# Altium PCB AC.PcbDoc
Units mm, origin at the board's own origin, x right, y up, seen from the top; angles counter-clockwise.
Board outline 72.39 x 44.07 mm, 2 copper layers (Top Layer, Bottom Layer); 13 components, 13 nets, 43 pads, 0 vias.
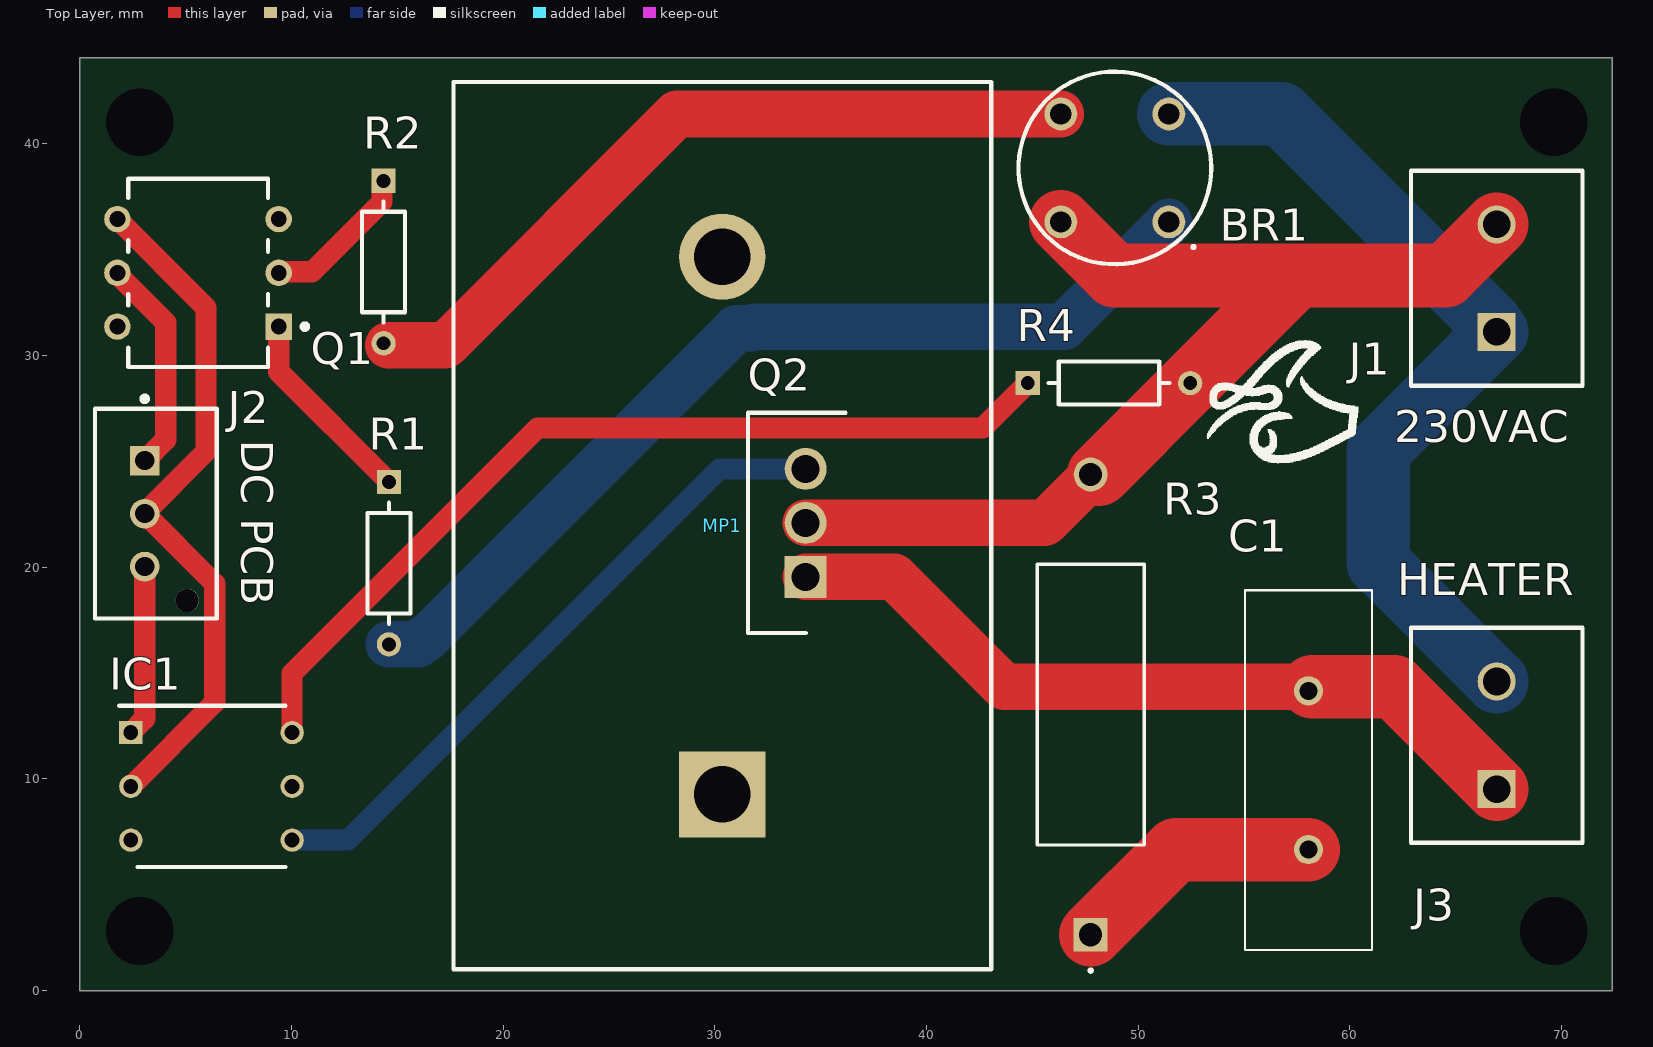
[diagram p0: Top Layer view]
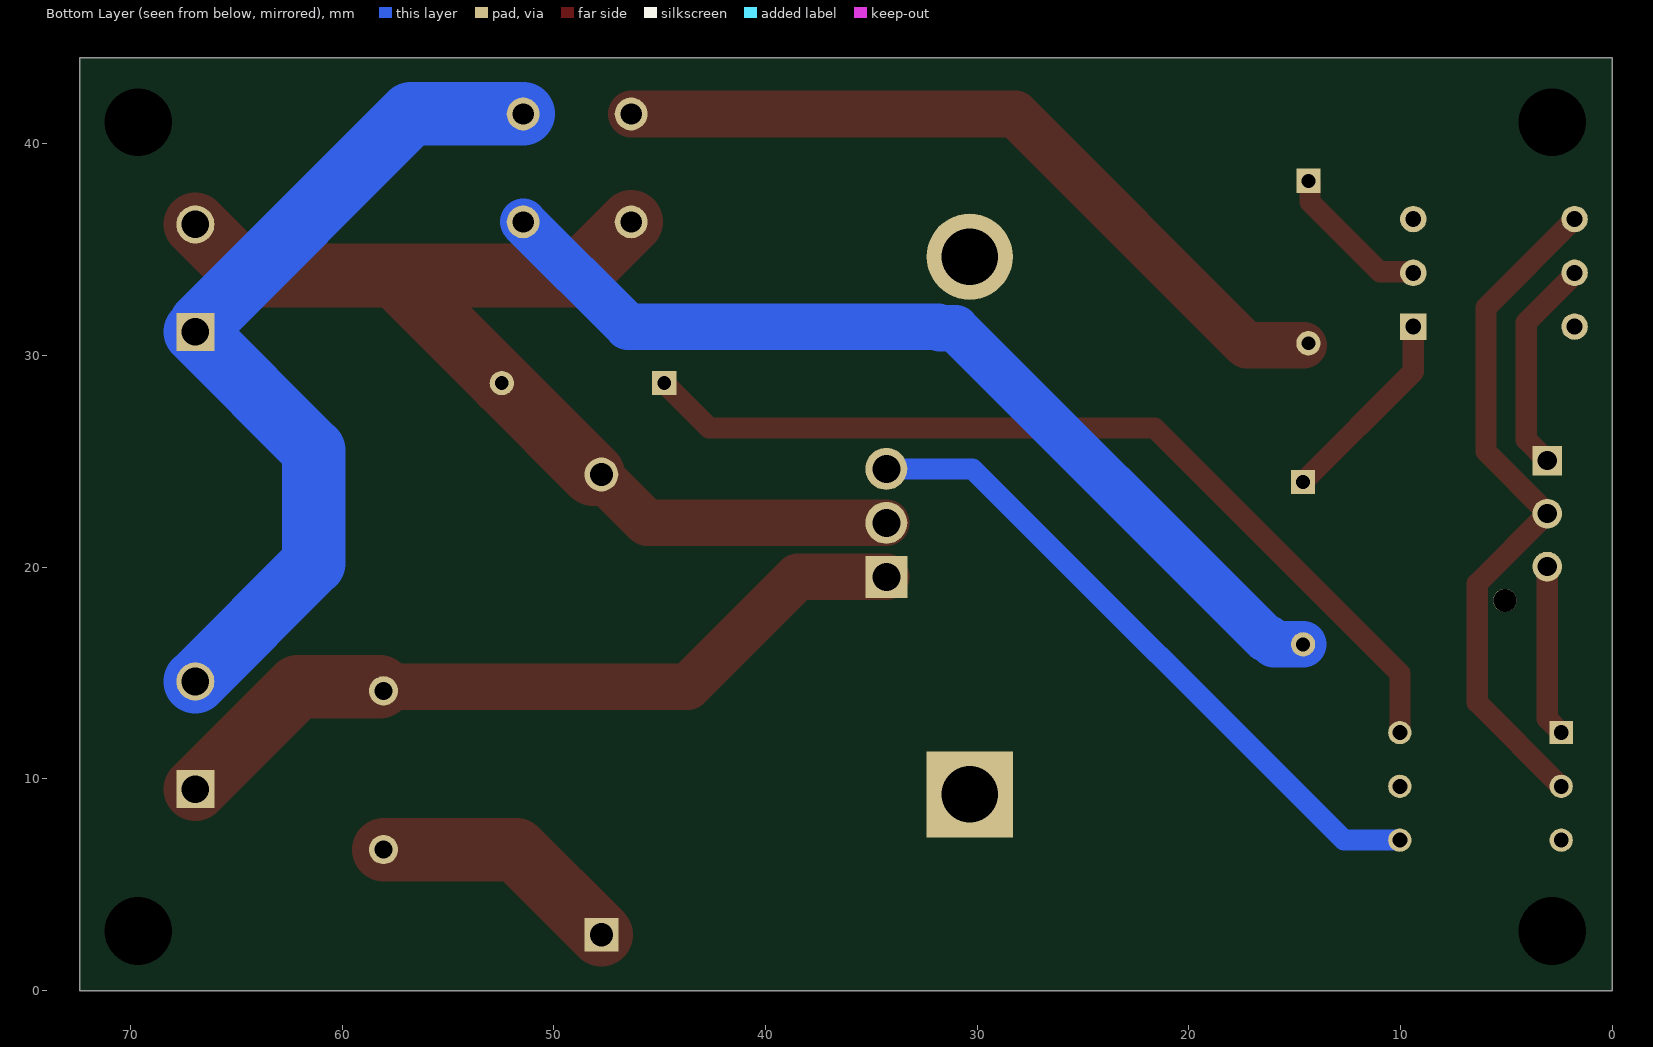
[diagram p1: Bottom Layer view, seen from below]
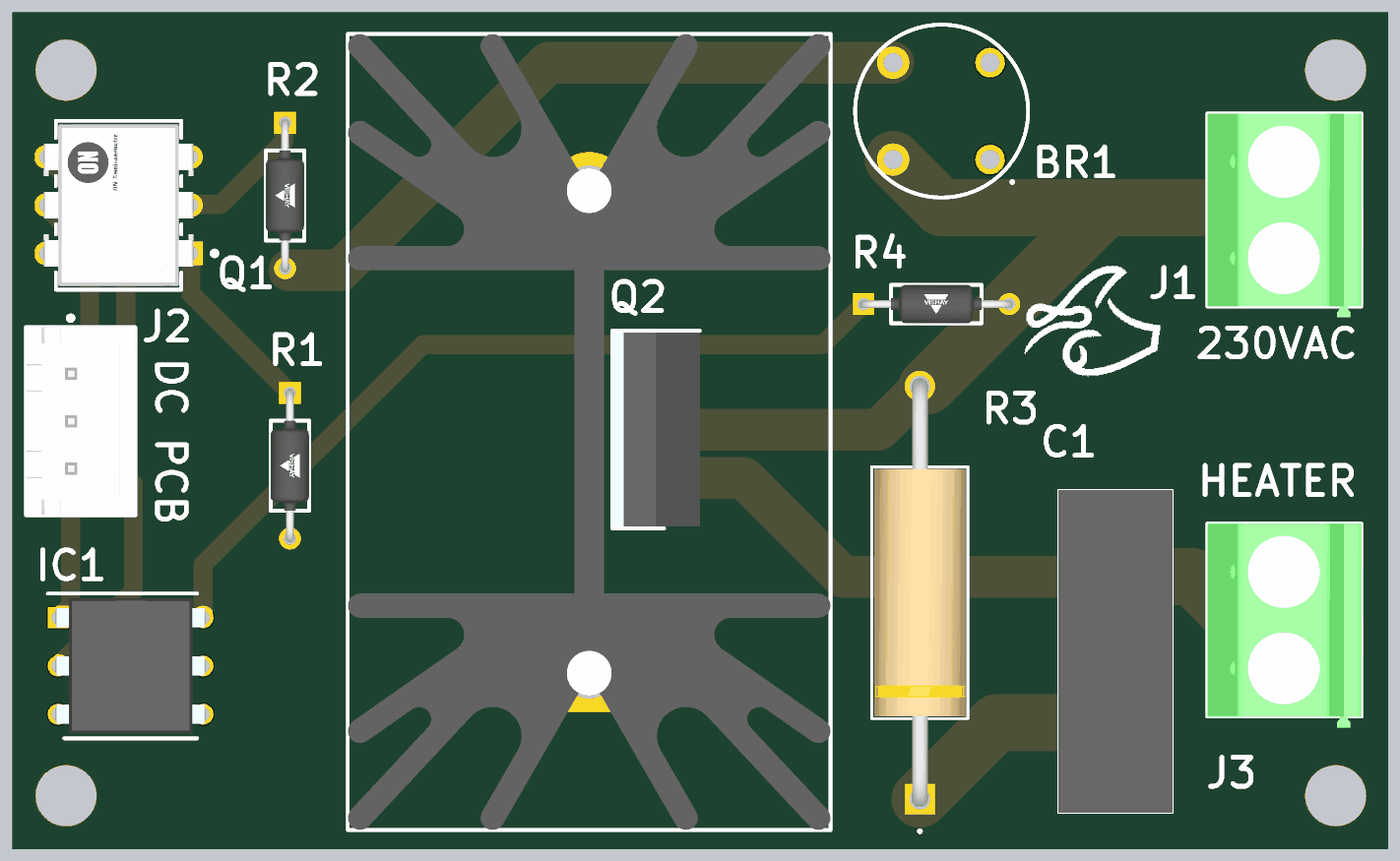
[diagram p2: 3D render of the assembled board from above, using the file's embedded part models]

## Layer stack, top to bottom
Top Solder: solder mask 0.0102, Solder Resist, Dk 3.5
Top Layer: signal copper 0.0356
Dielectric 1: dielectric 0.32, FR-4, Dk 4.8
Bottom Layer: signal copper 0.0356
Bottom Solder: solder mask 0.0102, Solder Resist, Dk 3.5

## Board outline
0,0 72.39,0 72.39,44.069 0,44.069

## Design rules (kind name [scope] priority, off if disabled: settings)
BoardOutlineClearance [All] p1: gap=0.2 ignorepadtopadclearanceinfootprint=FALSE
Clearance [All] p1: gap=0.127 ignorepadtopadclearanceinfootprint=FALSE except(0.25: Arc-Hole Track-Hole SMDPad-Hole THPad-Hole Via-Hole Fill-Hole Poly-Hole Region-Hole Text-Hole)
ComponentClearance [All] p1: gap=0.127 collisioncheckmode=3 verticalgap=0.127 showdistances=TRUE
DiffPairsRouting [All] p1: maxlimit=0.254 minlimit=0.127 mostfreqgap=0.127 toplayer_minwidth=0.127 toplayer_maxwidth=25.4 toplayer_prefwidth=0.127 bottomlayer_minwidth=0.127 bottomlayer_maxwidth=25.4 bottomlayer_prefwidth=0.127 maxuncoupledlength=12.7
Height [All] p1: minheight=0 maxheight=1816.048 prefheight=12.7
HoleSize [All] p1: absolutevalues=TRUE maxlimit=6.3 minlimit=0.3 maxpercent=80.000 minpercent=20.000
HoleToHoleClearance [All] p1: gap=0.25 allowstackedmicrovias=FALSE
MinimumAnnularRing [All] p1: minimumring=0.076
MinimumSolderMaskSliver [All] p1: minsoldermaskwidth=0
PlaneClearance [All] p1: clearance=0.127
PlaneConnect PlaneConnectPowerPads [InPadClass('PowerPads')] p1: planeconnectstyle=Direct reliefexpansion=0.508 reliefentries=4 reliefconductorwidth=0.254 reliefairgap=0.254
PlaneConnect [All] p2: pad.planeconnectstyle=Relief pad.reliefexpansion=0.3 pad.reliefentries=4 pad.reliefconductorwidth=0.127 pad.reliefairgap=0.127 via.planeconnectstyle=Direct via.reliefexpansion=0.3 via.reliefentries=4 via.reliefconductorwidth=0.127 via.reliefairgap=0.127
PolygonConnect PolygonConnectPowerPads [All vs (InPadClass('PowerPads'))] p1: connectstyle=Direct reliefconductorwidth=0.254 reliefentries=4 polygonreliefangle="90 Angle" airgapwidth=0.254
PolygonConnect [All] p2: thpad.connectstyle=Relief thpad.reliefconductorwidth=0.127 thpad.reliefentries=4 thpad.polygonreliefangle="90 Angle" thpad.airgapwidth=0.127 smdpad.connectstyle=Relief smdpad.reliefconductorwidth=0.127 smdpad.reliefentries=4 smdpad.polygonreliefangle="90 Angle" smdpad.airgapwidth=0.127 via.connectstyle=Direct via.reliefconductorwidth=0.127 via.reliefentries=4 via.polygonreliefangle="90 Angle" via.airgapwidth=0.127
RoutingVias [All] p1: holewidth=0.3 width=0.6 viastyle="Through Hole" minholewidth=0.3 minwidth=0.6 maxholewidth=0.6 maxwidth=6.6
SilkToSilkClearance [All] p1: silktosilkclearance=0
SilkToSolderMaskClearance [IsPad] p1: minsilkscreentomaskgap=0.127 clearancetoexposedcopper=TRUE
SolderMaskExpansion [All] p1: expansion=0.075 istentingtop=FALSE
Width [All] p1: maxlimit=25.4 minlimit=0.127 preferedwidth=0.127 minimp=50.000000 maximp=50.000000 favimp=50.000000
20 further rules are at their usual default settings.

## Components (designator, comment, footprint, x,y, rotation, side; value= is the part's Value field where it differs from the comment)
BR1 "2W10" 2W10 48.895,38.862 r180 top
C1 "DE2E3SA103MA3BY02F" DE2E3SA103MA3BY02F 58.039,10.414 r270 top
IC1 "MOC3021" DIP762W50P254L712H450Q6N 6.223,9.652 r0 top
J1 "1729128" PHOE-1729128-2_V 66.929,33.655 r90 top
J2 "B3B-XH-AM(LF)(SN)" FP-B3B-XH-AM_LF_SN-MFG 3.595,22.534 r270 top
J3 "1729128" PHOE-1729128-2_V 66.929,12.065 r90 top
MP1 "529802B02500G" FP-529802B02500G-MFG 30.353,21.971 r90 top
Q1 "4N25M" FP-646BX-MFG 5.588,33.909 r180 top
Q2 "BTA12-600B" TO255P460X1020X1965-3P 34.29,19.548 r90 top
R1 "CMF5073K200FHEB" FP-CMF50-0 14.605,20.193 r270 top value=47K
R2 "CMF5073K200FHEB" FP-CMF50-0 14.351,34.417 r270 top value=47K
R3 "AC03000003909JAC00" RES_AC03_VIS 47.752,2.642 r90 top
R4 "CMF5073K200FHEB" FP-CMF50-0 48.616,28.702 r0 top value=330ohm

## Footprints (in the part's own frame and the unit in brackets; to place one, negate y for a bottom-side part, rotate by r counter-clockwise, add the part's x,y. Pads: shape width x height; smd on the part's side, far side on the other; paste and mask are expansions set on the pad)
2W10 [mm]
  round 1.55 hole 1.01: 1(-2.55,2.55) 2(-2.55,-2.55) 3(2.55,-2.55) 4(2.55,2.55)
  silkscreen extent -4.55,-4.55 4.55,4.55
DE2E3SA103MA3BY02F [mm]
  round 1.381 hole 0.85: 1(-3.75,0) 2(3.75,0)
  silkscreen extent -8.5,-3 8.5,3, body extent -8.5,-3 8.5,3, height 20.1
DIP762W50P254L712H450Q6N [mm]
  rect 1.1x1.1 hole 0.7: 1(-3.81,2.54)
  round 1.1 hole 0.7: 2(-3.81,0) 3(-3.81,-2.54) 4(3.81,-2.54) 5(3.81,0) 6(3.81,2.54)
  silkscreen extent -4.36,-3.81 3.5,3.81, body extent -3.94,-3.56 3.94,3.56, height 4.5
FP-646BX-MFG [mm]
  rect 1.25x1.25 hole 0.75 paste-2539.97 mask+0: 1(-3.81,2.54)
  round 1.25 hole 0.75 paste-2539.97 mask+0: 2(-3.81,0) 3(-3.81,-2.54) 4(3.81,-2.54) 5(3.81,0) 6(3.81,2.54)
  silkscreen extent -5.18,-4.45 3.3,4.45, body extent -4.53,-4.54 4.53,4.54, height 0.25
FP-529802B02500G-MFG [mm]
  rect 4.07x4.07 hole 2.67 paste-2539.97 mask+0: 1(-12.7,0)
  round 4.07 hole 2.67 paste-2539.97 mask+0: 2(12.7,0)
  silkscreen extent -20.95,-12.7 20.95,12.7, body extent -21.05,-12.8 21.05,12.8, height 0.25
FP-B3B-XH-AM_LF_SN-MFG [mm]
  rect 1.4x1.4 hole 0.9 paste-2539.97 mask+0: 1(-2.5,-0.525)
  round 1.4 hole 0.9 paste-2539.97 mask+0: 2(0,-0.525) 3(2.5,-0.525)
  round 1.1 hole 1.1 unplated paste-2539.97 mask+0: ""(4.1,1.475)
  silkscreen extent -5.55,-2.88 4.95,2.88, body extent -5.05,-2.98 5.05,2.98, height 0.25
FP-CMF50-0 [mm]
  rect 1.15x1.15 hole 0.65 paste-2539.97 mask+0: 1(-3.835,0)
  round 1.15 hole 0.65 paste-2539.97 mask+0: 2(3.835,0)
  silkscreen extent -2.86,-1.01 2.86,1.01, body extent -4.51,-1.11 4.51,1.11, height 0.25
PHOE-1729128-2_V [mm] "Receptacle, 2-Leads, Body 8.1x10.16mm, Pitch 5.08mm"
  rect 1.8x1.8 hole 1.3: 1(-2.54,0)
  round 1.8 hole 1.3: 2(2.54,0)
  silkscreen extent -5.08,-4.05 5.08,4.05, body extent -5.65,-4.05 5.08,4.05, height 10.01
RES_AC03_VIS [mil]
  rect 63x63 / inner round 60 / far side rect 63x63 hole 43 paste-99999 mask+0: 1(0,0)
  round 63 / inner round 60 / far side round 63 hole 43 paste-99999 mask+0: 2(856,0)
  silkscreen extent -69,-99 689,100, body extent -16,-95 873,95, height 189
TO255P460X1020X1965-3P [mm]
  rect 1.98x1.98 hole 1.32: 1(0,0)
  round 1.98 hole 1.32: 2(2.55,0) 3(5.1,0)
  silkscreen extent -2.65,-1.88 7.75,2.72, body extent -2.55,-1.88 7.65,2.72, height 19.65

## Part data
BR1: "Bridge Rectifier", Manufacturer_Name=Good-Ark, Arrow Part Number=2W10, Arrow Price/Stock=https://www.arrow.com/en/products/2w10/good-ark-semiconductor?region=nac, Datasheet Link=https://goodarksemi.com/docs/datasheets/general_purpose_bridge_rectifiers/2Wxx.pdf, Manufacturer_Part_Number=2W10
C1: "Capacitor", Manufacturer_Name="Murata Electronics", Mouser Part Number=81-DE2E3SA103MA3BY2F, Arrow Part Number=DE2E3SA103MA3BY02F, Arrow Price/Stock=https://www.arrow.com/en/products/de2e3sa103ma3by02f/murata-manufacturing, Datasheet Link=https://psearch.en.murata.com/capacitor/product/DE2E3SA103MA3BY02F.html, Height=20mm, Manufacturer_Part_Number=DE2E3SA103MA3BY02F, Mouser Price/Stock=https://www.mouser.co.uk/ProductDetail/Murata-Electronics/DE2E3SA103MA3BY02F?qs=rrS6PyfT74eTx4TUt%2F2ksQ%3D%3D, Parameter 1=10nF
IC1: "Integrated Circuit", Manufacturer_Name=Isocom, Arrow Part Number=MOC3021, Arrow Price/Stock=https://www.arrow.com/en/products/moc3021/isocom?region=nac, Datasheet Link=https://www.arrow.com/en/products/moc3021/isocom, Height=4.5mm, Manufacturer_Part_Number=MOC3021
J1 J3: library part CMP-2000-05815-1, "PCB Terminal Block, 13.5 A, 400 V, 2-Pin THD, RoHS, Bulk", Current Rating=13500mA, Manufacturer="Phoenix Contact", Package Description="2-Pin Through Hole Device, Body 8.1 x 10.16 mm, Pitch 5.08 mm", Package Reference=1729128-2, Package Version=03/2015, Voltage Rating=400V, Datasheet URL=https://datasheet.ciiva.com/16046/1729128-16046181.pdf, Datasheet Version=12/2013, Manufacturer URL=http://www.phoenixcontact.com/, Mounting Technology=ThroughHole, No. of Positions=2, No. of Rows=1, Orientation=Horizontal, Package URL=https://www.phoenixcontact.com/online/portal/pi/pxc/product_detail_page/!ut/p/b1/3VdJjqNKFDxLH8AFycySyWY2ozFsEPOMMQaDOX1XedGL_1Vdm5YXJleknhSKeBkvI6EA8ncAo3AYoDhBQGco6KN7VURTdemj9us_IEKEZo_YHiPAEWEFmDGOHMORkqKYCORBZxgL7ZoaZYcbFFUZ3fqxSY6GOuxydWUuHqz1ynmMFygu583Bob0Ewr6Sd_l-5m-kAueHiB0jpRwZwe58wwtkpxtMYd_LmGcDRU02dRNEyWt6Y2ti5pSyJ_reIkzIulrqApdnbT11V5jnCKbYNCvhEM1MCpPByat_X379-iThf08CI5GfOPqfBeS3BRoBOdD55AKVv0iLwCMq-2BrzXWSGRH7pUGD9uwXQjiph3xL0DKQwdGa0JImiIOmBNOestqgwTHSSs2oOep-78apyXQBvNi8ZLaFjvjWvcaUEBu0MC6Wbe-d6mB0FAebo2lUWinqYaZs5DAYzV0RP9yitUjnGJ0iI9xhZkT42OCQNUJJhkgWINNQLP2JFP6OpMg3JCVg70jqHT0lvKOnhHf0lPuOnnLf0VPuWx6_dxwUIvwk5WMkT0kLL1mh61l2yZVSzG3pYV_bqo-mj6uMKwKwdnnW8Jh5RTOJzMOA5c-eJDaZQw4mTMPH02PvS_ZAqNVjVTo2WyYLkwH_KU1mmmG5kjRhDqPXLwwVHvVOjCM60-fpXvTDfMGW1PVFVS1r4e4yVDk4ZdNbkUHvqPqQSeian4UD39fNKmachqdJ1NJbyk8rXT9mXTvPk3oE5meulKGgiruPJek-4I9hTT6G8ZLOyRSm2RRVbThERQad5OS28hdt4YW4vG0stgYYzsWsK4_7y6DZMjJSCqri1kyiZR5vD7pwIrNR7QwPHTcLTI5qT7eRlpHrdGiupYlqQDJ7zy_CND8fWWBoLRXxk1RVcXiBQwbTD4Xi7KL-FuO94t9xaqweXzH, Packing=Bulk, PartNumber=1729128, Pitch=5.08mm, RoHS=TRUE
  J1: Parameter 1=230VAC
  J3: Parameter 1=Heater
J2: library part CMP-17438-000009-1, "CONN HEADER VERT 3POS 2.5MM", Color=Natural, Contact Resistance=20mR, Housing Color=White, Max Current Rating=3A, Max Operating Temperature=85°C, Max Voltage Rating (AC)=250V, Min Operating Temperature=-25°C, Connector Type="Male Pin", Contact Material=Brass, Contact Plating=Tin, Contact Type="Male Pin", Depth=5.75mm, Fastening Type=Detent, Gender=Male, Housing Material=Polyamide, Lead Free="Lead Free", Length=9.9mm, Mount="Through Hole", Number of Positions=3, Number of Rows=1, Orientation=Straight, Packaging=Bulk, Parameter 1="DC PCB", Pitch=0.098inch, Series=XH, Termination=Press-Fit
MP1: library part CMP-69313-000009-1, "HEATSINK TO-220 W/PINS 1.5\"TALL", Case/Package=Radial, Color=Black, Natural Thermal Resistance=3.7°C/W, Package Cooled=TO-220, Package Quantity=500, Thermal Resistance @ Forced Air Flow (100 LFM)=3°C/W, Depth=25.4mm, Finish=Anodized, Height=38.1mm, Height Off Base=1.5inch, Lead Free="Lead Free", Length=41.91mm, Material=Aluminium, Mount=Bolt, Packaging=Bulk, Radiation Hardening=No, REACH SVHC="No SVHC", RoHS Compliant=Yes, Series=5298, Shape=Fins, Type=Passive, Width=1.65inch
Q1: library part CMP-00278-84323282-1, "4N25M Optocoupler DC-IN 1-CH Transistor With Base DC-OUT 6-Pin PDIP Tube - Bulk", Case/Package=DIP, Collector Emitter Breakdown Voltage=30V, Collector Emitter Saturation Voltage=500mV, Current Transfer Ratio=20%, Forward Current=10mA, Forward Voltage=1.18V, Isolation Voltage=7.5kV, Manufacturer Lifecycle Status=ACTIVE, Max Input Current=50mA, Max Junction Temperature (Tj)=125°C, Max Operating Temperature=100°C, Max Power Dissipation=200mW, Min Operating Temperature=-55°C, Power Dissipation=250mW, Reverse Breakdown Voltage=6V, Approvals=UL, Collector Emitter Voltage (VCEO)=500mV, Fall Time=2µs, Height=5.08mm, Input Current=10mA, Lead Free="Lead Free", Length=7.12mm, Lifecycle Status=Production, Max Output Voltage=30V, Mount="Through Hole", NexarPartId=84323282, Number of Channels=1, Number of Circuits=1, Number of Elements=1, Number of Pins=6, Output Voltage=30V, Radiation Hardening=No, REACH SVHC="No SVHC", Reverse Voltage=6V, Rise Time=2µs, RoHS=Compliant, Schedule B="8541408000, 8541408000", Turn-Off Delay Time=2µs, Turn-On Delay Time=2µs, Weight=855mg, Width=6.5mm
Q2: "Triac", Manufacturer_Name=STMicroelectronics, Mouser Part Number=N/A, Datasheet Link=http://uk.rs-online.com/web/p/products/2512965, Height=4.6mm, Manufacturer_Part_Number=BTA12-600B, Mouser Price/Stock=https://www.mouser.co.uk/ProductDetail/STMicroelectronics/BTA12-600B?qs=gB4SHlWTQ%2FvH29WXA0SrJA%3D%3D
R1 R2: library part CMP-00030-44386654-1, "CMF5073K200FHEB Res Metal Film 73.2K Ohm 1% 0.125W(1/8W) ±50ppm/°C Epoxy AXL T/R", Case/Package=Axial, Max Operating Temperature=175°C, Max Power Dissipation=250mW, Min Operating Temperature=-55°C, Power Rating=125mW, Resistance=73.2kΩ, Temperature Coefficient=50ppm/°C, Tolerance=1%, Voltage Rating=200V, Composition="Metal Film", Diameter=1.65mm, Features="Flame Retardant Coating, Moisture Resistant", Lead Free="Lead Free", Length=3.81mm, Mount="Through Hole", NexarPartId=44386654, Number of Terminations=2, Packaging="Cut Tape", RoHS=Compliant, Schedule B="8533210090, 8533210090", Termination=Axial, Voltage Rating (DC)=200V, Width=1.65mm
R3: library part CMP-00030-42521922-1, "AC03000003909JAC00 AC03 Series Axial Wirewound Resistor 39Ohms +/-5% 3W -80 - -10ppm/degC", Case/Package=Axial, Max Operating Temperature=275°C, Max Power Dissipation=3W, Min Operating Temperature=-40°C, Resistance=39Ω, Temperature Coefficient=-10ppm/°C, Tolerance=5%, Voltage Rating (DC)=11V, Composition=Wirewound, Contact Plating=Tin, Diameter=4.8mm, Features="Flame Retardant Coating", Lead Diameter=800µm, Length=13mm, Military Standard=Not, NexarPartId=42521922, Number of Pins=2, Number of Terminations=2, Packaging="Cut Tape (CT)", Power Rating=3W, Radiation Hardening=No, REACH SVHC=Unknown, RoHS=Compliant, Schedule B="8533210080, 8533210080", Termination=Axial, Weight=749.986634mg, Width=4.8mm
R4: library part CMP-00030-44386654-1, "CMF5073K200FHEB Res Metal Film 73.2K Ohm 1% 0.125W(1/8W) ±50ppm/°C Epoxy AXL T/R", Case/Package=Axial, Max Operating Temperature=175°C, Max Power Dissipation=250mW, Min Operating Temperature=-55°C, Power Rating=125mW, Resistance=330ohm, Temperature Coefficient=50ppm/°C, Tolerance=1%, Voltage Rating=200V, Composition="Metal Film", Diameter=1.65mm, Features="Flame Retardant Coating, Moisture Resistant", Lead Free="Lead Free", Length=3.81mm, Mount="Through Hole", NexarPartId=44386654, Number of Terminations=2, Packaging="Cut Tape", RoHS=Compliant, Schedule B="8533210090, 8533210090", Termination=Axial, Voltage Rating (DC)=200V, Width=1.65mm

## Free pads (board coordinates)
  round 0 hole 3.2: 10(2.829,2.819) 10(2.829,41.021) 10(69.631,2.819) 10(69.631,41.021)

## Nets (pads, with @x,y where several pads share a name; then routed paths per layer and width w, separated by ;. In a path a pad name is that pad's centre, name@x,y a point inside that pad or via, vN(x,y) a via of type N, cw(c..) or ccw(c..) an arc to the next point about the centre after c; other vN are vias at no path point)
GND: IC1.2 J2.2 Q1.4 | length 32.7
  Top Layer w1: Q1.4 5.969,32.258 5.969,25.467 3.07,22.568 J2.2 6.374,19.23 6.374,13.613 IC1.2
NetBR1_1: BR1.1 R1.2 | length 45.1
  Bottom Layer w2.2: R1.2 15.977,16.358 16.256,16.637 16.369,16.637 31.014,31.282 31.757,31.282 31.844,31.369 46.502,31.369 BR1.1
NetBR1_2: BR1.2 J1.1 J3.2 | length 40.5
  Bottom Layer w3: BR1.2 56.759,41.412 J1.1@66.675,31.496 ; J3.2 61.341,20.193 61.341,25.527 J1.1
NetBR1_3: BR1.3 R2.2 | length 36.3
  Top Layer w2.2: R2.2@14.569,30.48 17.269,30.48 28.201,41.412 BR1.3
NetBR1_4: BR1.4 J1.2 Q2.2 R3.2 R4.2 | length 51
  Top Layer w2.2: Q2.2 45.593,22.098 R3.2@47.879,24.384
  Top Layer w3: BR1.4 48.874,33.783 58.04,33.783 ; R3.2@48.133,24.384 R4.2 57.532,33.783 58.04,33.783 ; J1.2 64.517,33.783 58.04,33.783
NetC1_1: C1.1 J3.1 Q2.1 | length 36.7
  Top Layer w2.2: Q2.1 38.478,19.548 43.675,14.351 57.852,14.351 C1.1
  Top Layer w3: C1.1@58.226,14.351 62.103,14.351 J3.1
NetC1_2: C1.2 R3.1 | length 12
  Top Layer w3: R3.1 51.774,6.664 C1.2
NetIC1_1: IC1.1 J2.3 | length 8.1
  Top Layer w1: IC1.1 3.07,12.849 J2.3
NetIC1_4: IC1.4 Q2.3 | length 31.5
  Bottom Layer w1: IC1.4@10.06,7.112 12.676,7.112 30.212,24.648 Q2.3
NetIC1_6: IC1.6 R4.1 | length 43.2
  Top Layer w1: IC1.6 10.033,14.986 21.622,26.575 42.654,26.575 R4.1
NetJ2_1: J2.1 Q1.5 | length 10.2
  Top Layer w1: Q1.5 1.778,33.841 4.064,31.555 4.064,26.028 J2.1
NetQ1_1: Q1.1 R1.1 | length 9.5
  Top Layer w1: Q1.1 9.398,29.235 R1.1
NetQ1_2: Q1.2 R2.1 | length 7.3
  Top Layer w1: Q1.2 9.446,33.957 10.97,33.957 14.276,37.263 14.276,38.177 R2.1
pads on no net: IC1.3 IC1.5 J2. MP1.1 MP1.2 Q1.3 Q1.6

## Silkscreen, mask and mechanical layers (free items; w line width, h text height)
Top Overlay:
  drawing of 2 lines, arcs and shapes, not listed
  text "DC PCB" at 7.62,26.035 h1.52 r270
  text "230VAC" at 62.103,25.908 h1.52
  text "HEATER" at 62.23,18.669 h1.52
Mechanical 13:
  the board outline again, w0.254